# Altium PCB SignalConditioningShield.PcbDoc
Units mm, origin at the board's own origin, x right, y up, seen from the top; angles counter-clockwise.
Board outline 30.1 x 31.37 mm, 2 copper layers (Top Layer, Bottom Layer); 33 components, 26 nets, 89 pads, 0 vias.
Unrouted connection lines stored in the file: 34.
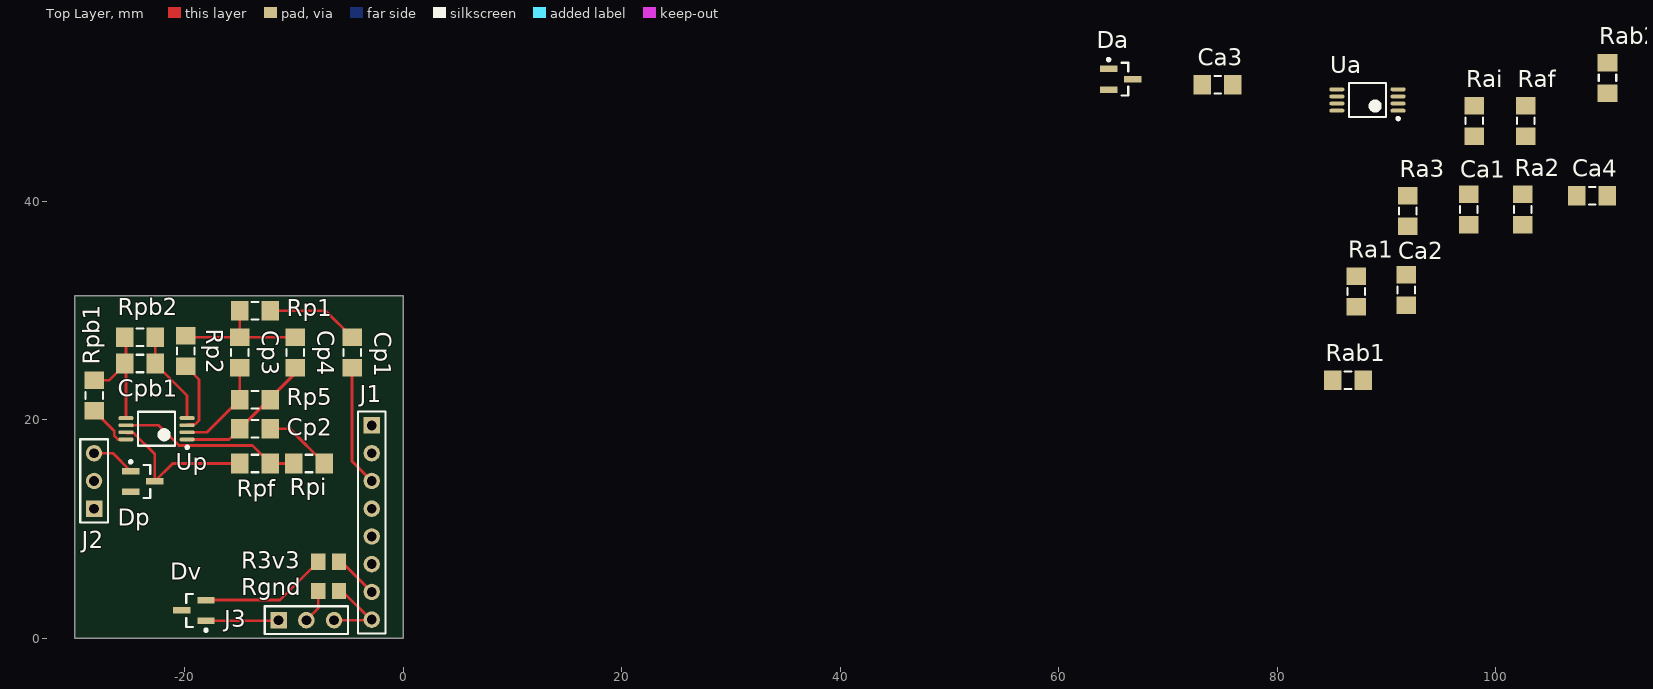
[diagram p0: Top Layer view]
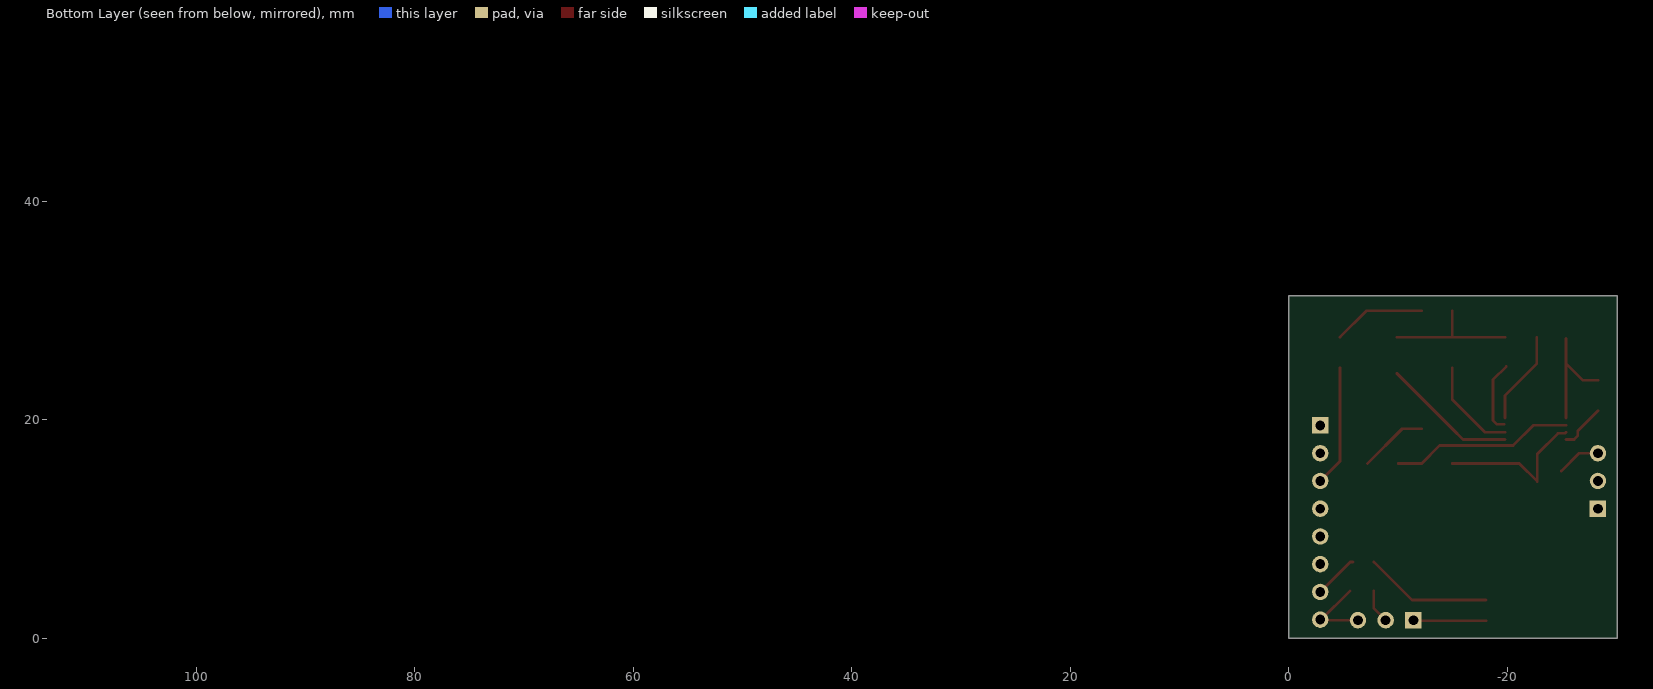
[diagram p1: Bottom Layer view, seen from below]

## Layer stack, top to bottom
Top Layer: signal copper 0.0356
Dielectric: dielectric 0.32, FR-4, Dk 4.8
Bottom Layer: signal copper 0.0356

## Board outline
-30.099,31.369 -30.099,0 0,0 0,31.369

## Design rules (kind name [scope] priority, off if disabled: settings)
Clearance [All] p1: gap=0.254
PolygonConnect [All] p1: connectstyle=Relief reliefconductorwidth=0.254 reliefentries=4 polygonreliefangle="90 Angle" airgapwidth=0.254
RoomDefinition SignalConditioningShield [InComponentClass('SignalConditioningShield')] p1: confinementstyle=ConfineIn formatcopy=TRUE lockcomponents=FALSE outline -30.099,0 0,0 0,31.369 -30.099,31.369
RoutingVias [All] p1: holewidth=0.711 width=1.27 viastyle="Through Hole" minholewidth=0.711 minwidth=1.27 maxholewidth=0.711 maxwidth=1.27
SolderMaskExpansion [All] p1: expansion=0.102
Width [All] p1: maxlimit=0.254 minlimit=0.254 preferedwidth=0.254
28 further rules are at their usual default settings.

## Components (designator, comment, footprint, x,y, rotation, side; value= is the part's Value field where it differs from the comment)
Ca1 "Cap Semi" 8-1206 97.536,39.243 r270 top
Ca2 "Cap Semi" 8-1206 91.821,31.877 r270 top
Ca3 "Cap Semi" 8-1206 74.549,50.673 r0 top
Ca4 "Cap Semi" 8-1206 108.839,40.513 r180 top
Cp1 "Cap Semi" 8-1206 -4.699,26.162 r270 top
Cp2 "Cap Semi" 8-1206 -13.589,19.177 r180 top
Cp3 "Cap Semi" 8-1206 -14.986,26.162 r90 top
Cp4 "Cap Semi" 8-1206 -9.906,26.162 r90 top
Cpb1 "Cap Semi" 8-1206 -24.13,25.146 r0 top
Da "BAT54S" SOT23_M 65.659,51.181 r0 top
Dp "BAT54S" SOT23_M -23.876,14.351 r0 top
Dv "BAT54S" SOT23_M -19.177,2.54 r180 top
J1 "ArduIMU_Connector" HDR1X8 -2.9,19.48 r270 top
J2 "Output" HDR1X3 -28.321,11.86 r90 top
J3 "OpAmp_Power" HDR1X3 -11.43,1.651 r0 top
R3v3 "0" 6-0805 -6.858,6.985 r0 top
Ra1 "0" 8-1206 87.249,31.75 r270 top
Ra2 "0" 8-1206 102.489,39.243 r90 top
Ra3 "0" 8-1206 91.948,39.116 r90 top
Rab1 "0" 8-1206 86.487,23.622 r180 top
Rab2 "0" 8-1206 110.236,51.308 r270 top
Raf "0" 8-1206 102.743,47.371 r90 top
Rai "0" 8-1206 98.044,47.371 r270 top
Rgnd "0" 6-0805 -6.858,4.318 r0 top
Rp1 "0" 8-1206 -13.589,29.972 r180 top
Rp2 "0" 8-1206 -19.939,26.289 r270 top
Rp5 "0" 8-1206 -13.589,21.844 r0 top
Rpb1 "0" 8-1206 -28.321,22.225 r270 top
Rpb2 "0" 8-1206 -24.13,27.559 r180 top
Rpf "0" 8-1206 -13.589,16.002 r180 top
Rpi "0" 8-1206 -8.636,16.002 r0 top
Ua "TS9222IDT" TSSOP8_L 88.265,49.276 r180 top
Up "TS9222IDT" TSSOP8_L -22.606,19.177 r180 top

## Footprints (in the part's own frame and the unit in brackets; to place one, negate y for a bottom-side part, rotate by r counter-clockwise, add the part's x,y. Pads: shape width x height; smd on the part's side, far side on the other; paste and mask are expansions set on the pad)
6-0805 [mm] "Chip Resistor; Body 2 x 1.2 mm (LxW typ)"
  rect 1.3x1.5 smd: 1(-0.95,0) 2(0.95,0)
8-1206 [mm] "Chip Resistor; Body 3.1 x 1.6 mm (LxW typ)"
  rect 1.6x1.8 smd: 1(-1.4,0) 2(1.4,0)
  silkscreen extent -0.3,-0.8 0.3,0.8
HDR1X3 [mm] "Connector; Header; 3 Position"
  rect 1.5x1.5 hole 0.9: 1(0,0)
  round 1.5 hole 0.9: 2(2.54,0) 3(5.08,0)
  silkscreen extent -1.27,-1.27 6.35,1.27
HDR1X8 [mm] "Connector; Header; 8 Position"
  rect 1.5x1.5 hole 0.9: 1(0,0)
  round 1.5 hole 0.9: 2(2.54,0) 3(5.08,0) 4(7.62,0) 5(10.16,0) 6(12.7,0) 7(15.24,0) 8(17.78,0)
  silkscreen extent -1.27,-1.27 19.05,1.27
SOT23_M [mm] "SOT23, 3-Leads, Body 2.9x1.3mm, Pitch 0.95mm, Lead Span 2.3mm, IPC Low Density"
  rect 1.6x0.6 smd: 1(-1.1,0.95) 2(-1.1,-0.95) 3(1.1,0)
  silkscreen extent -1.22,-1.5 0.7,1.92, body extent -0.7,-1.5 0.7,1.5, height 1.1
TSSOP8_L [mm] "TSOP, 8-Leads, Body 3x4.4mm, Pitch 0.65mm, IPC High Density"
  oval 1.4x0.35 smd: 1(-2.8,0.975) 2(-2.8,0.325) 3(-2.8,-0.325) 4(-2.8,-0.975) 5(2.8,-0.975) 6(2.8,-0.325) 7(2.8,0.325) 8(2.8,0.975)
  silkscreen extent -2.93,-1.55 1.7,1.82, body extent -2.25,-1.55 2.25,1.55, height 1.2

## Part data
Ca1 Ca2 Ca3 Ca4 Cp1 Cp2 Cp3 Cp4 Cpb1: "Capacitor (Semiconductor SIM Model)"
Da Dp Dv: "Schottky Barrier Double Diode"
J1: library part "Header 8", "Header, 8-Pin"
J2 J3: library part "Header 3", "Header, 3-Pin"
R3v3 Rgnd: library part ERJ6GE, "Thick Film Chip Resistor, 1 Ohm to 10M Ohm Range, 5% Tolerance, 0805 Size, 0.125 W"
Ra1 Ra2 Ra3 Rab1 Rab2 Raf Rai Rp1 Rp2 Rp5 Rpb1 Rpb2 Rpf Rpi: library part ERJ8EN, "Precision Thick Film Chip Resistor, 10 Ohm to 2.2M Ohm Range, 1% Tolerance, 1206 Size, 0.125 W"
Ua Up: "High precision, high stability dual operational amplifier"

## Nets (pads, with @x,y where several pads share a name; then routed paths per layer and width w, separated by ;. In a path a pad name is that pad's centre, name@x,y a point inside that pad or via, vN(x,y) a via of type N, cw(c..) or ccw(c..) an arc to the next point about the centre after c; other vN are vias at no path point)
3V3: J1.7 R3v3.2 | length 4.1
  Top Layer w0.254: R3v3.2 -5.645,6.985 J1.7
AIN1: Ca4.1 J1.2 Rab1.1 Rab2.2
GND: Ca1.1 J1.8 J3.3 Ra3.2 Rai.2 Rgnd.2 Rp2.2 Up.3 | length 13.8
  Top Layer w0.254: Rp2.2 -18.725,23.675 -18.725,19.922 -19.051,19.596 Up.3@-19.712,19.596 ; J3.3 -2.949,1.651 Rgnd.2@-5.616,4.318
MISO: J1.5
MOSI: J1.4
NetCa1_2: Ca1.2 Ca2.2 Ra1.2 Ra2.1
NetCa2_1: Ca2.1 Ra3.1 Ua.3
NetCa3_1: Ca3.1 Da.3 J2.1
NetCa3_2: Ca3.2 Ua.5
NetCa4_2: Ca4.2 Ra2.2 Raf.1 Ua.1
NetCp1_1: Cp1.1 Rp1.1 | length 8.5
  Top Layer w0.254: Rp1.1 -7.109,29.972 Cp1.1
NetCp2_1: Cp2.1 Rpi.2 | length 6.3
  Top Layer w0.254: Cp2.1 -10.411,19.177 Rpi.2
NetCp2_2: Cp2.2 Cp4.1 Rp5.2 Up.1 | length 12.4
  Top Layer w0.254: Up.1 -15.964,18.202 Cp2.2 Cp4.1@-9.906,24.26
NetCp3_1: Cp3.1 Rp5.1 Up.2 | length 9
  Top Layer w0.254: Up.2 -17.981,18.852 Rp5.1 Cp3.1@-14.989,24.759
NetCp3_2: Cp3.2 Cp4.2 Rp1.2 Rp2.1 | length 12.3
  Top Layer w0.254: Rp2.1@-19.812,27.562 Cp3.2 ; Rp1.2@-14.986,29.969 Cp3.2 ; Cp4.2 Cp3.2
NetCpb1_1: Cpb1.1 Rpb1.1 Rpb2.2 Up.5 | length 10.8
  Top Layer w0.254: Rpb1.1 -26.927,23.625 Cpb1.1@-25.406,25.146 ; Up.5 Cpb1.1@-25.406,25.146 ; Rpb2.2@-25.406,27.435 Cpb1.1@-25.406,25.146
NetDp_3: Dp.3 J2.2 Rpf.2 Up.7 | length 14.4
  Top Layer w0.254: Up.7 -25.312,18.758 -24.651,18.758 -22.776,16.883 Dp.3 -21.125,16.002 Rpf.2
NetDv_1: Dv.1 Dv.3 J3.1 | length 6.6
  Top Layer w0.254: Dv.1 J3.1@-11.491,1.59
NetRa1_1: Ra1.1 Ua.6 Ua.7
NetRaf_2: Raf.2 Rai.1 Ua.2
NetRpf_1: Rpf.1 Rpi.1 Up.6 | length 16.8
  Top Layer w0.254: Up.6 -22.417,19.502 -20.561,17.646 -13.833,17.646 Rpf.1 Rpi.1
PWM1: Cp1.2 J1.3 | length 11.1
  Top Layer w0.254: Cp1.2 -4.699,16.199 J1.3
RST1: J1.1
SCK: J1.6
V+: Da.2 Dp.2 Dv.2 R3v3.1 Rab1.2 Rpb1.2 Ua.8 Up.8 | length 16
  Top Layer w0.254: Rpb1.2 -26.487,18.991 -26.487,18.542 -26.147,18.202 Up.8 ; Dv.2 -11.303,3.49 R3v3.1
V-: Cpb1.2 Da.1 Dp.1 J2.3 J3.2 Rab2.1 Rgnd.1 Rpb2.1 Ua.4 Up.4 | length 15.9
  Top Layer w0.254: J2.3 -26.615,16.94 Dp.1 ; Rpb2.1 Cpb1.2 -19.806,22.222 Up.4 ; J3.2@-8.702,1.651 J3.2 -7.808,2.733 Rgnd.1